# Altium PCB Infrared_Send_RE .PcbDoc
Units mil, origin at the board's own origin, x right, y up, seen from the top; angles counter-clockwise.
Board outline 2559.06 x 3937.01 mil, 2 copper layers (Top Layer, Bottom Layer); 84 components, 31 nets, 310 pads, 137 vias.
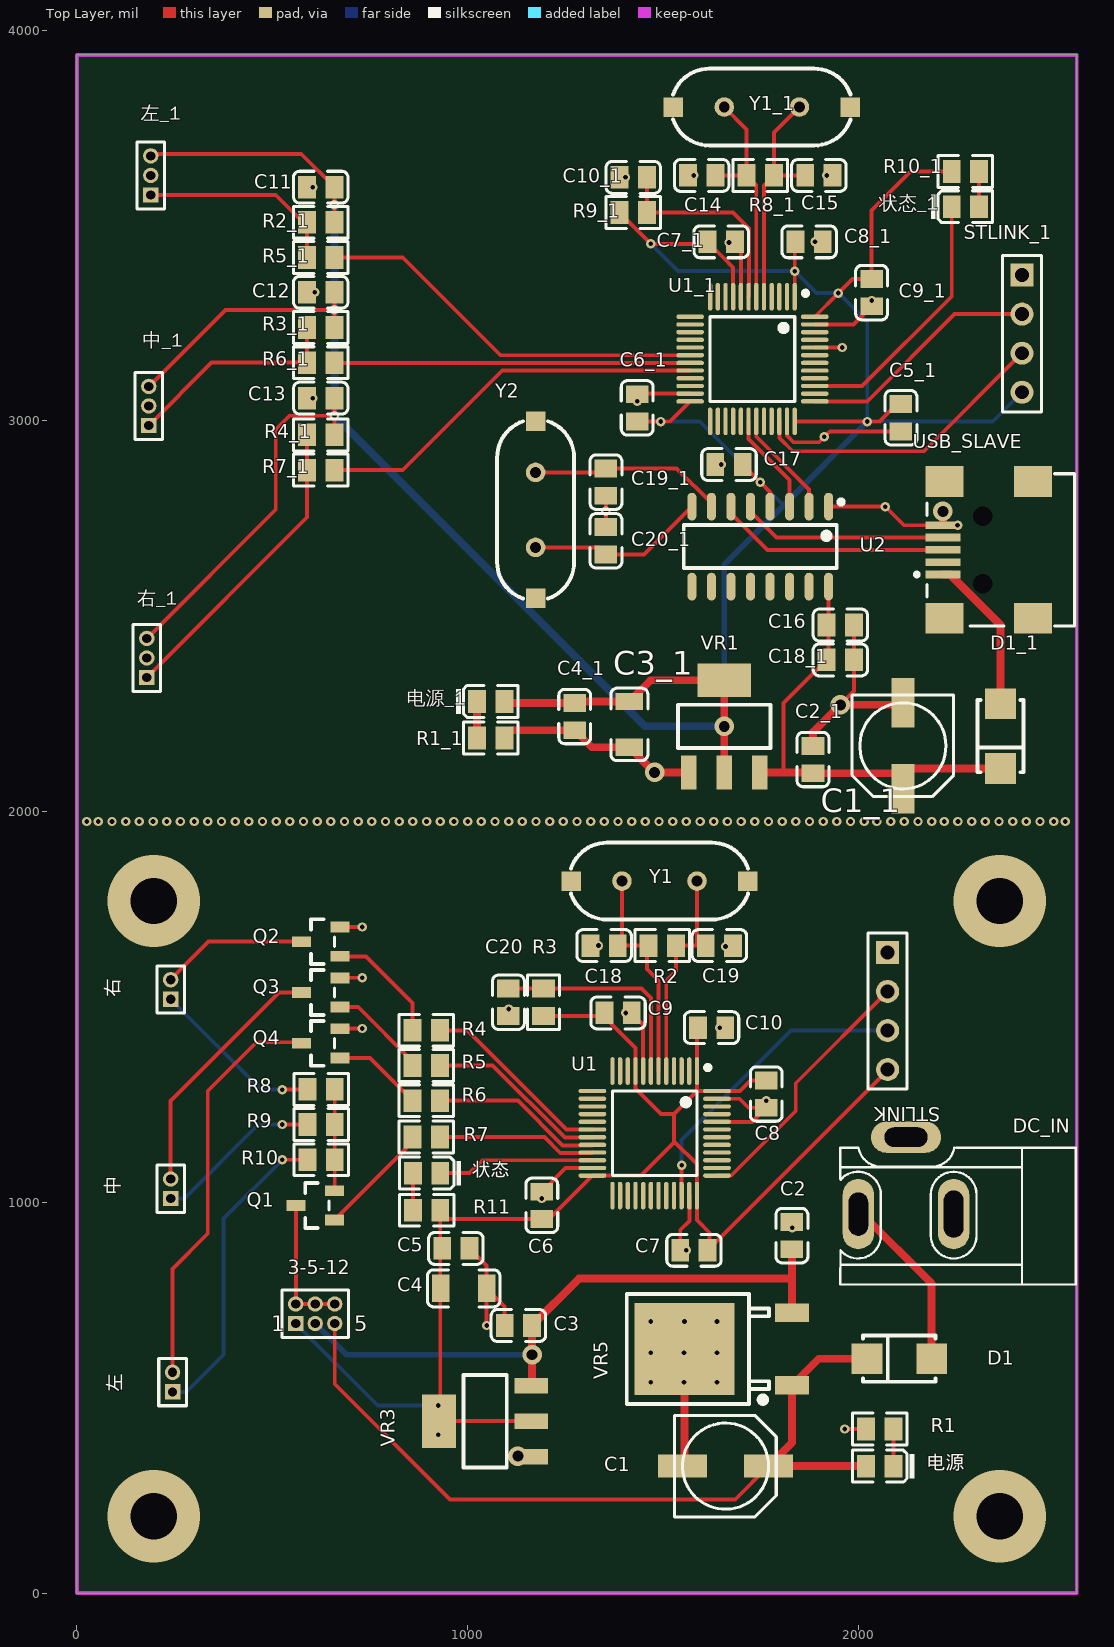
[diagram p0: Top Layer view]
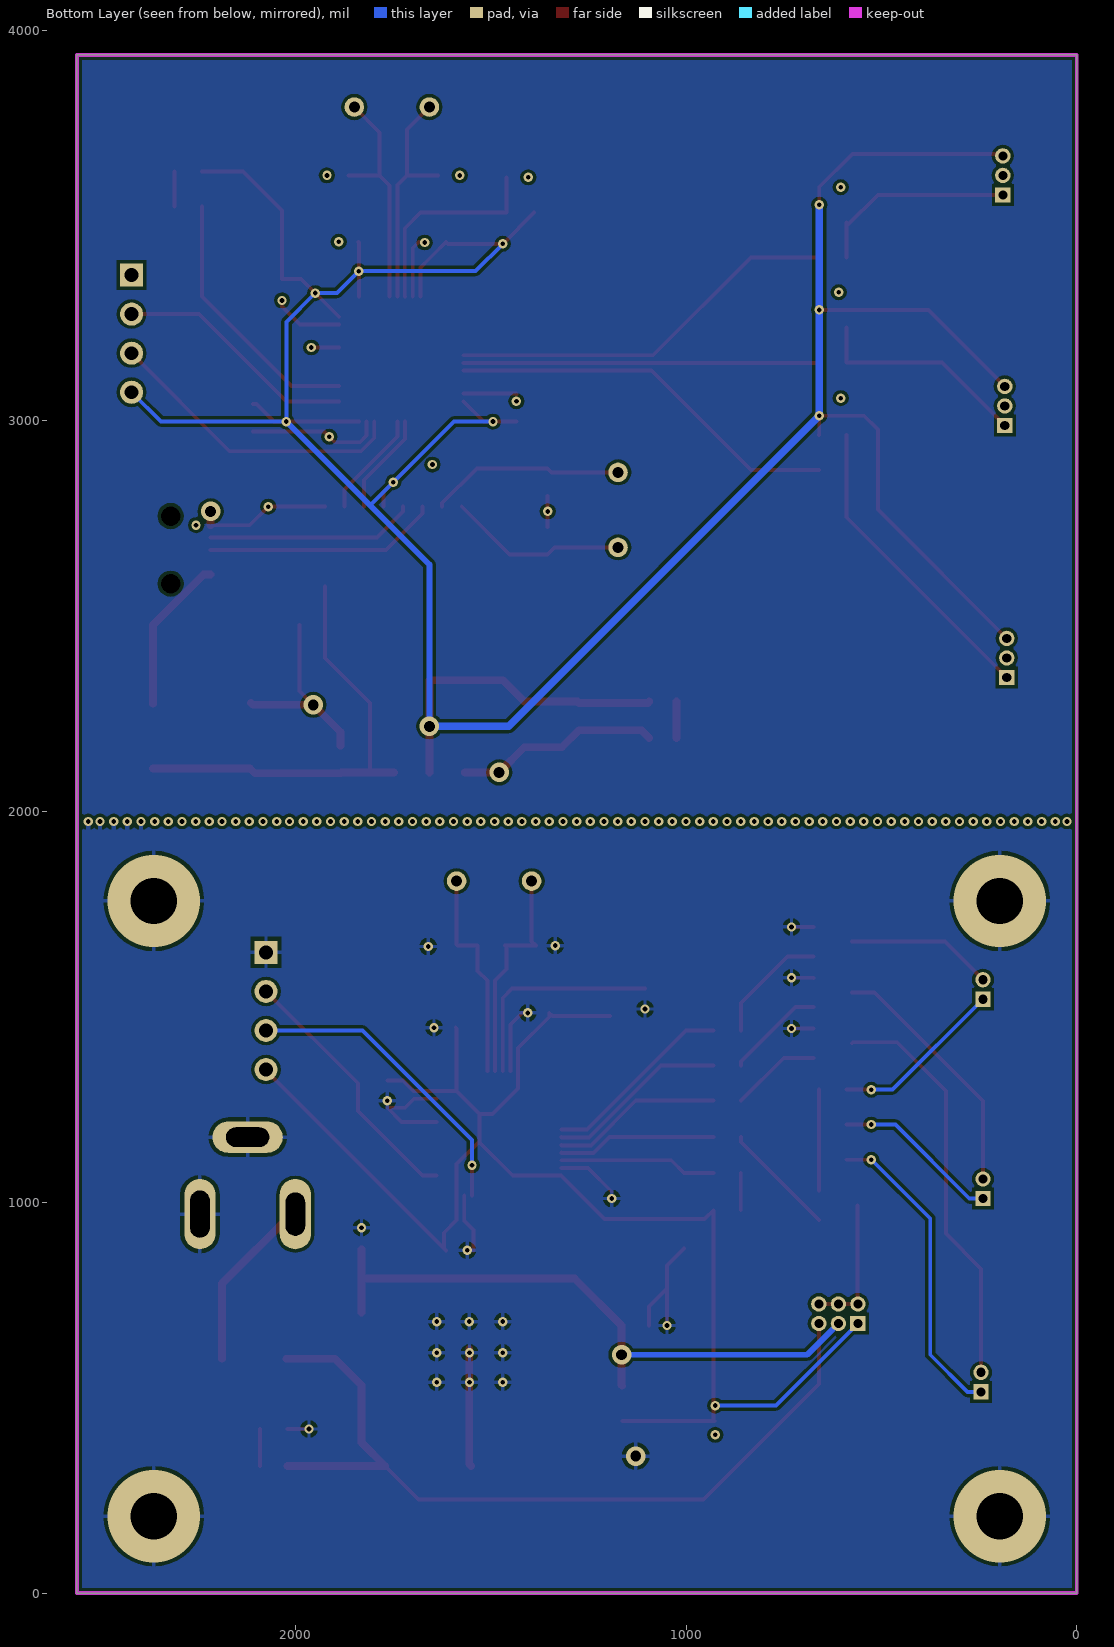
[diagram p1: Bottom Layer view, seen from below]
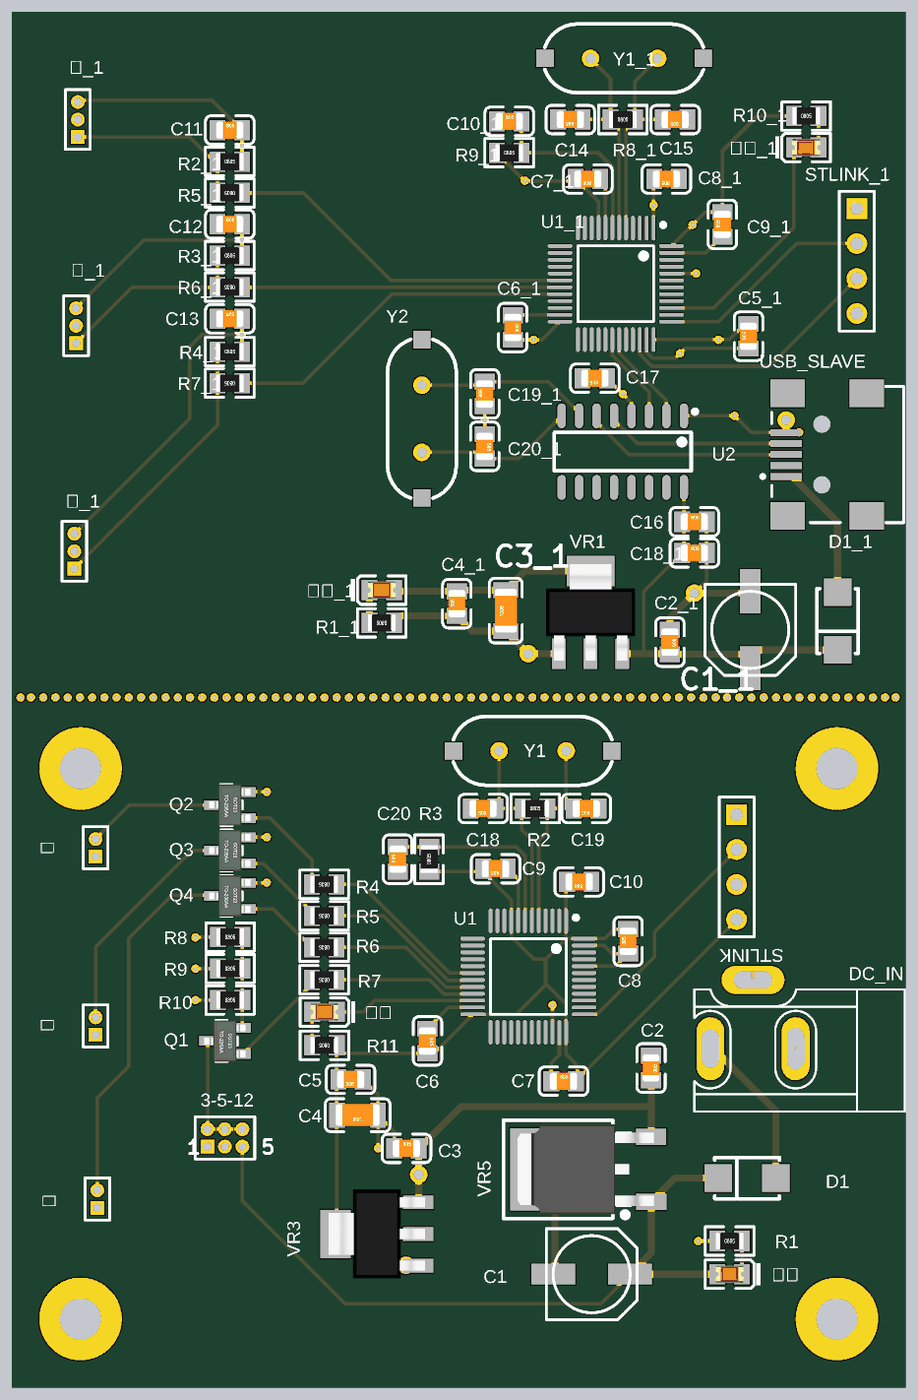
[diagram p2: 3D render of the assembled board from above, using the file's embedded part models]

## Layer stack, top to bottom
Top Solder: solder mask 0.4, Solder Resist, Dk 3.5
Top Layer: signal copper 1.4
Dielectric 1: dielectric 12.6, FR-4, Dk 4.8
Bottom Layer: signal copper 1.4
Bottom Solder: solder mask 0.4, Solder Resist, Dk 3.5

## Board outline
0,0 0,3937.01 2559.05,3937.01 2559.06,0

## Design rules (kind name [scope] priority, off if disabled: settings)
Clearance [All] p1: gap=8 ignorepadtopadclearanceinfootprint=FALSE
PolygonConnect [All] p1: connectstyle=Relief reliefconductorwidth=10 reliefentries=4 polygonreliefangle="90 Angle" airgapwidth=10
RoutingVias [All] p1: holewidth=28 width=50 viastyle="Through Hole" minholewidth=28 minwidth=50 maxholewidth=28 maxwidth=50
SolderMaskExpansion [All] p1: expansion=4
Width [All] p1: maxlimit=20 minlimit=8 preferedwidth=10
30 further rules are at their usual default settings.

## Classes and differential pairs
component class Infrared_Send: 3-5-12 C1 C2 C3 C4 C5 C6 C7 C8 C9 C10 C18 C19 C20 D1 DC_IN Q1 Q2 Q3 Q4 R1 R2 R3 R4 R5 R6 R7 R8 R9 R10 R11 STLINK U1 VR3 VR5 Y1 ״̬ 中 右 左 电源

## Components (designator, comment, footprint, x,y, rotation, side; value= is the part's Value field where it differs from the comment)
3-5-12 "MHDR2X3" MHDR2X3 560,690 r0 top
C1 "220uF" CC6.56.5 1660,325 r180 top
C1_1 "220uF" CC6.56.5 2114.05,2168.5 r90 top (schematic designator C1)
C2 "1uF (105) 10% 50V" LC-0805_C 1830,915 r270 top
C2_1 "100nF(104) 10% 50V" LC-0805_C 1884.05,2133.5 r270 top (schematic designator C2)
C3 "100nF(104) 10% 50V" LC-0805_C 1130,685 r0 top
C3_1 "4.7uF (475) 10% 50V" LC-1206_C 1414.05,2223.5 r90 top (schematic designator C3)
C4 "4.7uF (475) 10% 50V" LC-1206_C 990,780 r180 top
C4_1 "100nF(104) 10% 50V" LC-0805_C 1274.05,2243.5 r90 top (schematic designator C4)
C5 "100nF(104) 10% 50V" LC-0805_C 970,882.28 r180 top
C5_1 "100nF(104) 10% 50V" LC-0805_C 2109.05,3008.5 r90 top (schematic designator C5)
C6 "100nF(104) 10% 50V" LC-0805_C 1190,992.32 r270 top
C6_1 "100nF(104) 10% 50V" LC-0805_C 1434.05,3033.5 r270 top (schematic designator C6)
C7 "100nF(104) 10% 50V" LC-0805_C 1579.39,877.32 r0 top
C7_1 "100nF(104) 10% 50V" LC-0805_C 1649.05,3458.5 r180 top (schematic designator C7)
C8 "100nF(104) 10% 50V" LC-0805_C 1764.39,1277.32 r90 top
C8_1 "100nF(104) 10% 50V" LC-0805_C 1874.05,3458.5 r180 top (schematic designator C8)
C9 "100nF(104) 10% 50V" LC-0805_C 1385,1485 r180 top
C9_1 "100nF(104) 10% 50V" LC-0805_C 2034.05,3328.5 r90 top (schematic designator C9)
C10 "100nF(104) 10% 50V" LC-0805_C 1624.39,1447.32 r180 top
C10_1 "100nF(104) 10% 50V" LC-0805_C 1424.09,3623.5 r0 top (schematic designator C10)
C11 "4.7nF (472) 10% 50V" LC-0805_C 624.05,3598.5 r0 top
C12 "4.7nF (472) 10% 50V" LC-0805_C 624.05,3329.29 r0 top
C13 "4.7nF (472) 10% 50V" LC-0805_C 624.09,3058.5 r0 top
C14 "22pF (220) 5% 50V" LC-0805_C 1599.05,3628.5 r180 top
C15 "22pF (220) 5% 50V" LC-0805_C 1899.05,3628.5 r180 top
C16 "10uF (106) 10% 25V" LC-0805_C 1954.05,2477.69 r0 top
C17 "100nF(104) 10% 50V" LC-0805_C 1669.05,2888.5 r180 top
C18 "22pF (220) 5% 50V" LC-0805_C 1349.35,1657.32 r180 top
C18_1 "100nF(104) 10% 50V" LC-0805_C 1954.05,2388.5 r0 top (schematic designator C18)
C19 "22pF (220) 5% 50V" LC-0805_C 1644.43,1657.32 r180 top
C19_1 "22pF (220) 5% 50V" LC-0805_C 1354.05,2843.5 r90 top (schematic designator C19)
C20 "100nF(104) 10% 50V" LC-0805_C 1104.39,1512.32 r90 top
C20_1 "22pF (220) 5% 50V" LC-0805_C 1354.05,2693.5 r270 top (schematic designator C20)
D1 "SS210" LC-SMA(DO-214AC)_S1 2105,600 r0 top
D1_1 "SS210" LC-SMA(DO-214AC)_S1 2364.05,2193.5 r90 top (schematic designator D1)
DC_IN "POWER" DC10B 2419.09,1140.04 r180 top
Q1 "SS8050 Y1" LC-SOT-23(SOT-23-3) 610,992.32 r0 top locked
Q2 "SS8050 Y1" LC-SOT-23(SOT-23-3) 624.39,1667.28 r0 top locked
Q3 "SS8050 Y1" LC-SOT-23(SOT-23-3) 624.39,1537.28 r0 top locked
Q4 "SS8050 Y1" LC-SOT-23(SOT-23-3) 624.39,1407.28 r0 top locked
R1 "10KΩ (1002) ±1%" LC-0805_R 2055,420 r0 top
R1_1 "10KΩ (1002) ±1%" LC-0805_R 1059.09,2188.5 r180 top (schematic designator R1)
R2 "1MΩ (1004) ±1%" LC-0805_R 1498.29,1657.32 r0 top
R2_1 "4.7KΩ (4701) ±1%" LC-0805_R 624.05,3508.5 r0 top (schematic designator R2)
R3 "10KΩ (1002) ±1%" LC-0805_R 1194.39,1512.32 r90 top
R3_1 "4.7KΩ (4701) ±1%" LC-0805_R 624.05,3239.29 r0 top (schematic designator R3)
R4 "1KΩ (1001) ±1%" LC-0805_R 894.39,1440.35 r180 top
R4_1 "4.7KΩ (4701) ±1%" LC-0805_R 624.13,2964.39 r0 top (schematic designator R4)
R5 "1KΩ (1001) ±1%" LC-0805_R 894.39,1350.39 r180 top
R5_1 "1KΩ (1001) ±1%" LC-0805_R 624.09,3418.5 r180 top (schematic designator R5)
R6 "1KΩ (1001) ±1%" LC-0805_R 894.39,1260.35 r180 top
R6_1 "1KΩ (1001) ±1%" LC-0805_R 624.05,3149.29 r180 top (schematic designator R6)
R7 "1KΩ (1001) ±1%" LC-0805_R 894.39,1167.32 r180 top
R7_1 "1KΩ (1001) ±1%" LC-0805_R 624.13,2874.39 r180 top (schematic designator R7)
R8 "100Ω (1000) ±1%" LC-0805_R 625.04,1289.25 r0 top locked
R8_1 "1MΩ (1004) ±1%" LC-0805_R 1749.05,3628.5 r0 top (schematic designator R8)
R9 "100Ω (1000) ±1%" LC-0805_R 625.04,1199.25 r0 top locked
R9_1 "10KΩ (1002) ±1%" LC-0805_R 1424.05,3533.5 r0 top (schematic designator R9)
R10 "100Ω (1000) ±1%" LC-0805_R 625.04,1109.25 r0 top locked
R10_1 "10KΩ (1002) ±1%" LC-0805_R 2274.05,3638.5 r0 top (schematic designator R10)
R11 "10KΩ (1002) ±1%" LC-0805_R 895,980 r180 top
STLINK "Header 4" HDR1X4 2075,1640 r270 top
STLINK_1 "Header 4" HDR1X4 2419.05,3373.5 r270 top (schematic designator STLINK)
U1 "STM32F103C8T6" LC-LQFP-48_7x7x05P 1478.92,1176.77 r180 top
U1_1 "STM32F103C8T6" LC-LQFP-48_7x7x05P 1729.02,3158.5 r180 top (schematic designator U1)
U2 "CH340G" LC-SOIC-16_150mil 1749.05,2678.5 r180 top
USB_SLAVE "USB-B(Mini)" USB/SM0.8-6H5 2525.75,2670.12 r0 top
VR1 "AMS1117-3.3" LC-SOT-223 1656.93,2218.5 r270 top
VR3 "AMS1117-3.3" LC-SOT-223 1045,440 r0 top
VR5 "L78M05ABDT-TR" LC-TO-252-2-180 1830.59,625 r180 top
Y1 "8MHz" XTAL_US 1395.06,1822.32 r0 top
Y1_1 "8MHz" XTAL_US 1656.93,3803.5 r0 top (schematic designator Y1)
Y2 "12MHz" XTAL_US 1174.05,2868.5 r270 top
中 "MHDR1X2" MHDR1X2 240,1010 r90 top
中_1 "MHDR1X3" MHDR1X3 184.05,2988.5 r90 top (schematic designator 中)
右 "MHDR1X2" MHDR1X2 240,1520 r90 top
右_1 "MHDR1X3" MHDR1X3 179.05,2343.5 r90 top (schematic designator 右)
左 "MHDR1X2" MHDR1X2 245,515 r90 top
左_1 "MHDR1X3" MHDR1X3 189.05,3578.5 r90 top (schematic designator 左)
状态 "翠绿 0805" LC-0805_LED_S1 895,1075 r180 top (schematic designator ״̬)
状态_1 "翠绿 0805" LC-0805_LED_S1 2274.05,3548.5 r0 top (schematic designator ״̬)
电源 "红灯 0805" LC-0805_LED_S1 2055,325 r180 top locked
电源_1 "红灯 0805" LC-0805_LED_S1 1059.05,2282.17 r0 top (schematic designator 电源)

## Footprints (in the part's own frame and the unit in brackets; to place one, negate y for a bottom-side part, rotate by r counter-clockwise, add the part's x,y. Pads: shape width x height; smd on the part's side, far side on the other; paste and mask are expansions set on the pad)
CC6.56.5 [mm]
  rect 3.2x1.5 smd: 1(-2.794,0) 2(2.8,0)
  silkscreen extent -3.3,-3.3 3.3,3.3
DC10B [mil]
  oval 80x180 hole 50 slot 110 at 90 deg: 1(419.09,170)
  oval 80x180 hole 50 slot 120 at 90 deg: 2(175,170)
  oval 180x80 hole 50 slot 110 at 0 deg: 3(297.05,-26.85)
  silkscreen extent -138,0 465,350
HDR1X4 [mm] "Connector; Header; 4 Position"
  rect 1.5x1.5 hole 0.9: 1(0,0)
  round 1.5 hole 0.9: 2(2.54,0) 3(5.08,0) 4(7.62,0)
  silkscreen extent -1.27,-1.27 8.89,1.27
LC-0805_C [mm]
  rect 1.16x1.47 smd: 1(-0.89,0) 2(0.89,0)
  silkscreen extent -1.77,-1.04 1.77,1.04, body extent -1,-0.62 1,0.63, height 0.77
LC-0805_LED_S1 [mm]
  rect 1.16x1.47 smd: A(0.89,0) K(-0.89,0)
  silkscreen extent -2.25,-1.04 1.77,1.03, body extent -1.01,-0.62 1.01,0.62, height 1.1
LC-0805_R [mm]
  rect 1.16x1.47 smd: 1(-0.89,0) 2(0.89,0)
  silkscreen extent -1.77,-1.04 1.77,1.03, body extent -1,-0.62 1,0.63, height 0.49
LC-1206_C [mm]
  rect 1.13x1.8 smd: 1(-1.49,0) 2(1.49,0)
  silkscreen extent -2.36,-1.2 2.35,1.2, body extent -1.6,-0.81 1.6,0.79, height 1
LC-LQFP-48_7x7x05P [mm]
  oval 0.28x1.8 smd mask+0.051: 1(-2.75,-4.05) 2(-2.25,-4.05) 3(-1.75,-4.05) 4(-1.25,-4.05) 5(-0.75,-4.05) 6(-0.25,-4.05) 7(0.25,-4.05) 8(0.75,-4.05) 9(1.25,-4.05) 10(1.75,-4.05) 11(2.25,-4.05) 12(2.75,-4.05) 25(2.75,4.05) 26(2.25,4.05) 27(1.75,4.05) 28(1.25,4.05) 29(0.75,4.05) 30(0.25,4.05) 31(-0.25,4.05) 32(-0.75,4.05) 33(-1.25,4.05) 34(-1.75,4.05) 35(-2.25,4.05) 36(-2.75,4.05)
  oval 1.8x0.28 smd mask+0.051: 13(4.05,-2.75) 14(4.05,-2.25) 15(4.05,-1.75) 16(4.05,-1.25) 17(4.05,-0.75) 18(4.05,-0.25) 19(4.05,0.25) 20(4.05,0.75) 21(4.05,1.25) 22(4.05,1.75) 23(4.05,2.25) 24(4.05,2.75) 37(-4.05,2.75) 38(-4.05,2.25) 39(-4.05,1.75) 40(-4.05,1.25) 41(-4.05,0.75) 42(-4.05,0.25) 43(-4.05,-0.25) 44(-4.05,-0.75) 45(-4.05,-1.25) 46(-4.05,-1.75) 47(-4.05,-2.25) 48(-4.05,-2.75)
  silkscreen extent -3.6,-4.42 2.75,2.75
LC-SMA(DO-214AC)_S1 [mm]
  rect 2x2 smd: 1(2.1,0) 2(-2.1,0)
  silkscreen extent -2.35,-1.5 2.35,1.5
LC-SOIC-16_150mil [mm]
  oval 0.6x1.8 smd: 1(-4.445,-2.6) 2(-3.175,-2.6) 3(-1.905,-2.6) 4(-0.635,-2.6) 5(0.635,-2.6) 6(1.905,-2.6) 7(3.175,-2.6) 8(4.445,-2.6) 9(4.445,2.6) 10(3.175,2.6) 11(1.905,2.6) 12(0.635,2.6) 13(-0.635,2.6) 14(-1.905,2.6) 15(-3.175,2.6) 16(-4.445,2.6)
  silkscreen extent -5.4,-3.05 4.97,1.4
LC-SOT-23(SOT-23-3) [mm]
  rect 1.25x0.7 smd: 1(1.25,-0.95) 2(1.25,0.95) 3(-1.25,0)
  silkscreen extent -0.65,-1.46 0.9,1.46, body extent -1.5,-1.5 1.5,1.5, height 1.3
LC-SOT-223 [mm]
  rect 2.2x1 smd: 1(3,-2.3) 2(3,0) 3(3,2.3)
  rect 2.2x3.5 smd: 2(-3,0)
  silkscreen extent -1.4,-3 1.4,3, body extent -3.49,-3.24 3.49,3.24, height 1.64
LC-TO-252-2-180 [mm] "180度编带包装"
  rect 2.2x1.2 smd: 1(0,2.361) 3(0.004,-2.361)
  rect 6.5x6 smd: 2(7,0)
  silkscreen extent 1.5,-3.57 10.75,3.57, body extent -0.2,-3.27 9.74,3.27, height 2.44
MHDR1X2 [mm] "Connector; Header; 2 Position"
  rect 1x1 hole 0.6: 1(0,0)
  round 1 hole 0.6: 2(1.27,0)
  silkscreen extent -0.9,-0.9 2.17,0.9
MHDR1X3 [mm] "Connector; Header; 3 Position"
  rect 1x1 hole 0.6: 1(0,0)
  round 1 hole 0.6: 2(1.27,0) 3(2.54,0)
  silkscreen extent -0.9,-0.9 3.44,0.9
MHDR2X3 [mm] "Connector; Header; 3x2 Position"
  rect 1x1 hole 0.6: 1(0,0)
  round 1 hole 0.6: 2(0,1.27) 3(1.27,0) 4(1.27,1.27) 5(2.54,0) 6(2.54,1.27)
  silkscreen extent -0.9,-0.9 3.44,2.17
USB/SM0.8-6H5 [mm]
  rect 2.3x0.5 smd: 1(-7.85,-1.6) 2(-7.85,-0.8) 3(-7.85,0) 4(-7.85,0.8) 5(-7.85,1.6)
  rect 2.5x2 smd: 6(-7.75,4.45) 7(-1.996,4.45) 8(-7.75,-4.45) 9(-1.996,-4.45)
  round 0.6 hole 1.27 unplated: MH1(-5.25,2.2) MH2(-5.25,-2.2)
  silkscreen extent -9.67,-4.95 0.7,4.95
XTAL_US [mil]
  round 50 hole 28: 1(0,0) 2(192.13,0)
  rect 50x50 smd: ""(-130.32,0) ""(322.44,0)
  silkscreen extent -131,-98 323,98

## Part data
3-5-12: "Header, 3-Pin, Dual row", LatestRevisionDate=17-Jul-2002, LatestRevisionNote="Re-released for DXP Platform.", Publisher="Altium Limited"
C1 C1_1: library part CAP
C2: library part "0805 1uF (105) 10% 50V", "贴片电容", Package=0805, SuppliersPartNumber=C28323, ComponentLink1Description=供应商, ComponentLink1URL=http://www.szlcsc.com/product/details_29074.html, Supplier=LC
C2_1 C3 C4_1 C5 C5_1 C6 C6_1 C7 C7_1 C8 C8_1 C9 C9_1 C10 C10_1 C17 C18_1 C20: library part "0805 100nF(104) 10% 50V", "贴片电容", Package=0805, SuppliersPartNumber=C49678, ComponentLink1Description=供应, ComponentLink1URL=http://www.szlcsc.com/product/details_50686.html, Supplier=LC
C3_1 C4: library part "1206 4.7uF (475) 10% 50V", "贴片电容", Package=1206, SuppliersPartNumber=C29823, ComponentLink1Description=供应商, ComponentLink1URL=http://www.szlcsc.com/product/details_30577.html, Supplier=LC
C11 C12 C13: library part "0805 4.7nF (472) 10% 50V", "贴片电容", Package=0805, SuppliersPartNumber=C1744, ComponentLink1Description=供应, ComponentLink1URL=http://www.szlcsc.com/product/details_2096.html, Supplier=LC
C14 C15 C18 C19 C19_1 C20_1: library part "0805 22pF (220) 5% 50V", "贴片电容", Package=0805, SuppliersPartNumber=C1804, ComponentLink1Description=供应, ComponentLink1URL=http://www.szlcsc.com/product/details_2156.html, Supplier=LC
C16: library part "0805 10uF (106) 10% 25V", "贴片电容", Package=0805, SuppliersPartNumber=C15850, ComponentLink1Description=供应, ComponentLink1URL=http://www.szlcsc.com/product/details_16532.html, Supplier=LC
D1 D1_1: library part "SMA(DO-214AC) SS210", "二极管", Package=SMA(DO-214AC), SuppliersPartNumber=C14996, ComponentLink1Description=供应, ComponentLink1URL=http://www.szlcsc.com/product/details_15669.html, Supplier=LC
DC_IN: library part POW
Q1 Q2 Q3 Q4: library part "SOT-23 SS8050 Y1", "三极管", Package=SOT-23, SuppliersPartNumber=C2150, ComponentLink1Description=供应, ComponentLink1URL=http://www.szlcsc.com/product/details_2507.html, Supplier=LC
R1 R1_1 R3 R9_1 R10_1 R11: library part "0805 10KΩ (1002) 1%", "贴片电阻", Package=0805, SuppliersPartNumber=C17414, ComponentLink1URL=http://www.szlcsc.com/product/details_18102.html, Supplier=LC
  R1 R1_1 R3 R9_1: ComponentLink1Description=供应
  R10_1 R11: ComponentLink1Description=供应商
R2 R8_1: library part "0805 1MΩ (1004) 1%", "贴片电阻", Package=0805, SuppliersPartNumber=C17514, ComponentLink1Description=供应, ComponentLink1URL=http://www.szlcsc.com/product/details_18202.html, Supplier=LC
R2_1 R3_1 R4_1: library part "0805 4.7KΩ (4701) 1%", "贴片电阻", Package=0805, SuppliersPartNumber=C17673, ComponentLink1Description=供应商, ComponentLink1URL=http://www.szlcsc.com/product/details_18361.html, Supplier=LC
R4 R5 R5_1 R6 R6_1 R7 R7_1: library part "0805 1KΩ (1001) 1%", "贴片电阻", Package=0805, SuppliersPartNumber=C17513, ComponentLink1URL=http://www.szlcsc.com/product/details_18201.html, Supplier=LC
  R4 R5 R6 R7: ComponentLink1Description=供应
  R5_1 R6_1 R7_1: ComponentLink1Description=供应商
R8 R9 R10: library part "0805 100Ω (1000) 1%", "贴片电阻", Package=0805, SuppliersPartNumber=C17408, ComponentLink1URL=http://www.szlcsc.com/product/details_18096.html, Supplier=LC
  R8: ComponentLink1Description=供应
  R9 R10: ComponentLink1Description=供应商
STLINK STLINK_1: "Header, 4-Pin", LatestRevisionDate=17-Jul-2002, LatestRevisionNote="Re-released for DXP Platform.", Publisher="Altium Limited"
U1 U1_1: "ARM", Package=LQFP-48_7x7x05P, SuppliersPartNumber=C8734, ComponentLink1Description=供应, ComponentLink1URL=http://www.szlcsc.com/product/details_9243.html, Supplier=LC
U2: "USB", Package=SOIC-16_150mil, SuppliersPartNumber=C14267, ComponentLink1Description=供应, ComponentLink1URL=http://www.szlcsc.com/product/details_14927.html, Supplier=LC
USB_SLAVE: library part USB5
VR1 VR3: library part "SOT-223 AMS1117-3.3", "低压差线性稳压(LDO)", Package=SOT-223, SuppliersPartNumber=C6186, ComponentLink1Description=供应, ComponentLink1URL=http://www.szlcsc.com/product/details_6652.html, Supplier=LC
VR5: library part "TO-252-2 L78M05ABDT-TR", "低压差线性稳压(LDO)", Package=TO-252-2, SuppliersPartNumber=C58069, ComponentLink1Description=供应商, ComponentLink1URL=http://www.szlcsc.com/product/details_59107.html, Supplier=LC
Y1 Y1_1 Y2: library part XTAL, "Crystal Oscillator", LatestRevisionDate=17-Jul-2002, LatestRevisionNote="Re-released for DXP Platform.", Published=8-Jun-2000, Publisher="Altium Limited"
中 右 左: "Header, 2-Pin", LatestRevisionDate=17-Jul-2002, LatestRevisionNote="Re-released for DXP Platform.", Publisher="Altium Limited"
中_1 右_1 左_1: "Header, 3-Pin", LatestRevisionDate=17-Jul-2002, LatestRevisionNote="Re-released for DXP Platform.", Publisher="Altium Limited"
状态 状态_1: library part "0805 翠绿", "发光二极管", Package=0805, SuppliersPartNumber=C2297, ComponentLink1Description=供应商, ComponentLink1URL=http://www.szlcsc.com/product/details_2670.html, Supplier=LC
电源 电源_1: library part "0805 红灯", "发光二极管", Package=0805, SuppliersPartNumber=C2295, ComponentLink1Description=供应, ComponentLink1URL=http://www.szlcsc.com/product/details_2668.html, Supplier=LC

## Via types
v1: diameter 24, hole 12, Top Layer to Bottom Layer, 127 vias
v2: diameter 50, hole 28, Top Layer to Bottom Layer, 6 vias
v3: diameter 236.22, hole 118.11, Top Layer to Bottom Layer, 4 vias

## Nets (pads, with @x,y where several pads share a name; then routed paths per layer and width w, separated by ;. In a path a pad name is that pad's centre, name@x,y a point inside that pad or via, vN(x,y) a via of type N, cw(c..) or ccw(c..) an arc to the next point about the centre after c; other vN are vias at no path point)
38K: Q1.1 R7.2 | length 295.3
  Top Layer w10: Q1.1 859.35,1155.06 R7.2
+3.3: 3-5-12.1 C4.2 C5.2 C6.2 C7.2 C8.2 C9.2 C10.2 R3.1 R11.1 STLINK.4 U1.1 U1.9 U1.24 U1.36 U1.48 VR3.2 | length 3901.9
  Top Layer w10: VR3.2@1163.11,440 926.89,440 929.96,443.07 929.96,685 929.96,775 930.04,775.08 R11.1 952.76,957.28 C6.2 1208.25,957.28 U1.24 1443.44,1068.5 1530,1155.06 ; R3.1 1342.24,1477.28 C9.2 1349.96,1475.04 1429.71,1395.29 U1.9 1429.71,1291.43 1495.16,1225.98 1528.13,1225.98 ; C10.2 1587.19,1445.16 U1.1 1587.19,1285.04 ; C7.2 C7.2@1619.39,882.28 ; C8.2 1724.43,1312.36 1697.11,1285.04 U1.48 1587.19,1285.04 ; STLINK.4 2075,1337.89 C7.2@1619.39,882.28 ; 1528.13,1225.98 1528.13,1156.93 1530,1155.06 ; 1528.13,1225.98 1587.19,1285.04 ; 1530,1155.06 1587.19,1097.87 U1.36 1587.19,954.53 1619.39,922.32 C7.2@1619.39,882.28
  Bottom Layer w10: 3-5-12.1 770,480 v1(925,480)
  other v1: 925,405
+5: 3-5-12.3 C2.2 C3.2 VR3.3 VR5.3 | length 1718
  Top Layer w20: VR3.3 1165.04,532.48 C3.2 1285.04,805 1830.43,805 ; C2.2 1830.43,879.53 1830.43,805 ; VR5.3 1830.43,805
  Bottom Layer w15: 3-5-12.3@614.81,690 3-5-12.3 690,610 690.24,610 ; 624.81,675.43 690.24,610 ; v2(1165,610) 690.24,610
+12: 3-5-12.5 C1.1 D1.2 VR5.1 电源.A | length 2124.4
  Top Layer w10: 3-5-12.5 660,535 955,240 1685,240 C1.1
  Top Layer w20: 电源.A C1.1 1830.59,385.59 VR5.1 1898.55,600 D1.2
GND: C1.2 C2.1 C3.1 C4.1 C5.1 C6.1 C7.1 C8.1 C9.1 C10.1 C18.2 C19.1 C20.1 DC_IN.2 DC_IN.3 Q2.2 Q3.2 Q4.2 R1.1 STLINK.1 U1.8 U1.23 U1.35 U1.44 U1.47 VR3.1 VR5.2 | length 1598
  Top Layer w10: Q4.2 674.08,1445.16 v1(730,1445.16) ; Q3.2 673.92,1575 v1(730,1575) ; Q2.2 673.92,1705 v1(730,1705) ; C5.1 1048.66,838.66 C4.1 ; v1(1048.66,685) C4.1 ; C3.1 1094.96,733.7 C4.1 ; C6.1 1250.83,1088.19 U1.23 ; C9.1 1449.39,1455.65 U1.8 ; C7.1 1544.35,928.86 1567.5,952.01 U1.35 ; U1.44 1728.41,1206.3 C8.1 1719.43,1242.28 1696.36,1265.35 U1.47 ; v1(1965,420) R1.1
  Top Layer w20: C1.2 1555,330.24 VR5.2
  other v1: 1469.08,540 1554.08,540 1638.37,540 1469.08,615 1554.08,615 1638.37,615 1469.08,695 1555,695 1638.37,695 1560,877.32 1830.59,935 1190,1010 1764.39,1260 1645,1447.32 1405,1485 1105,1495 1660,1655 1335,1657.32 2395,1975 2430,1975 2465,1975 2500,1975 2530,1975
  other v2: 1128.7,350.71
  other v3: 196.85,196.85 2362.2,196.85 196.85,1771.65 2362.2,1771.65
Left: Q2.1 R4.2 | length 305.4
  Top Layer w10: Q2.1 740.12,1629.88 859.35,1510.65 R4.2
Middle: Q3.1 R5.2 | length 253.7
  Top Layer w10: Q3.1 720.12,1499.88 859.35,1360.65 R5.2
Net3-5-12_2: 3-5-12.2 3-5-12.4 3-5-12.6 Q1.3 | length 352.6
  Top Layer w10: Q1.3 560.79,740.79 3-5-12.2 3-5-12.6
NetC18_1: C18.1 R2.1 U1.6 Y1.1 | length 583.1
  Top Layer w10: Y1.1 1395.06,1667.99 C18.1 R2.1 1459.39,1653.46 1459.39,1597.28 1488.76,1567.91 U1.6
NetC19_2: C19.2 R2.2 U1.5 Y1.2 | length 543.6
  Top Layer w10: U1.5 1508.45,1567.44 1533.33,1592.32 R2.2 ; R2.2@1538.33,1657.32 1584.39,1657.32 1587.19,1660.12 Y1.2
NetC20_2: C20.2 R3.2 U1.7 | length 561.8
  Top Layer w10: C20.2 R3.2 1445.15,1547.36 1469.08,1523.44 U1.7
NetD1_1: D1.1 DC_IN.1 | length 453.6
  Top Layer w20: DC_IN.1 2009.96,970.04 2187.68,792.32 D1.1
NetQ1_2: Q1.2 R8.2 R9.2 R10.2 | length 259.9
  Top Layer w10: Q1.2 660.08,1030.59 R10.2 R9.2 R8.2
NetQ2_3: Q2.3 右.2 | length 375.5
  Top Layer w10: 右.2 337.28,1667.28 Q2.3
NetQ3_3: Q3.3 中.2 | length 650
  Top Layer w10: 中.2 240,1260 517.28,1537.28 Q3.3
NetQ4_3: Q4.3 左.2 | length 1050.4
  Top Layer w10: 左.2 245,830 335,920 335,1285 460,1410 572.46,1410 Q4.3
NetR1_2: R1.2 电源.K | length 95
  Top Layer w10: 电源.K R1.2
NetR4_1: R4.1 U1.18 | length 495.1
  Top Layer w10: R4.1 999.65,1440.35 1253.39,1186.61 U1.18
NetR5_1: R5.1 U1.19 | length 467
  Top Layer w10: R5.1 1064.15,1350.39 1248.79,1165.76 1318.3,1165.76 U1.19
NetR6_1: R6.1 U1.20 | length 437.9
  Top Layer w10: R6.1 1128.73,1260.35 1243.02,1146.07 1318.3,1146.07 U1.20
NetR7_1: R7.1 U1.21 | length 407.5
  Top Layer w10: R7.1 1196.31,1167.32 1237.25,1126.39 1318.3,1126.39 U1.21
NetR8_1: R8.1 右.1 | length 445.9
  Top Layer w10: v1@525.75,1289.25 R8.1
  Bottom Layer w10: 右.1 471.5,1288.5 v1(525.75,1288.5)
NetR9_1: R9.1 中.1 | length 428.4
  Top Layer w10: v1(525.75,1199.25) R9.1
  Bottom Layer w10: 中.1 275,1010 464.25,1199.25 v1(525.75,1199.25)
NetR10_1: R10.1 左.1 | length 795.3
  Top Layer w10: v1(525.75,1109.25) R10.1
  Bottom Layer w10: 左.1 280,515 375,610 375,958.5 v1(525.75,1109.25)
NetR11_2: R11.2 状态.A | length 95
  Top Layer w10: R11.2 状态.A
NetU1_22: U1.22 状态.K | length 403
  Top Layer w10: 状态.K 1005,1075 1037.87,1107.87 U1.22
Right: Q4.1 R6.2 | length 231.1
  Top Layer w10: Q4.1 749.83,1369.88 R6.2
SWCLK: STLINK.2 U1.37 | length 673.7
  Top Layer w10: U1.37 1674.79,1068.5 1840,1233.72 1840,1305 STLINK.2
SWDIO: STLINK.3 U1.34 | length 785.9
  Top Layer w10: U1.34 v1(1547.82,1095)
  Bottom Layer w10: v1(1547.82,1095) 1547.82,1160.14 1827.68,1440 STLINK.3
U_RX: U1.31
U_TX: U1.30
pads on no net: C1_1.1 C1_1.2 C2_1.1 C2_1.2 C3_1.1 C3_1.2 C4_1.1 C4_1.2 C5_1.1 C5_1.2 C6_1.1 C6_1.2 C7_1.1 C7_1.2 C8_1.1 C8_1.2 C9_1.1 C9_1.2 C10_1.1 C10_1.2 C11.1 C11.2 C12.1 C12.2 C13.1 C13.2 C14.1 C14.2 C15.1 C15.2 C16.1 C16.2 C17.1 C17.2 C18_1.1 C18_1.2 C19_1.1 C19_1.2 C20_1.1 C20_1.2 D1_1.1 D1_1.2 R1_1.1 R1_1.2 R2_1.1 R2_1.2 R3_1.1 R3_1.2 R4_1.1 R4_1.2 R5_1.1 R5_1.2 R6_1.1 R6_1.2 R7_1.1 R7_1.2 R8_1.1 R8_1.2 R9_1.1 R9_1.2 R10_1.1 R10_1.2 STLINK_1.1 STLINK_1.2 STLINK_1.3 STLINK_1.4 U1.2 U1.3 U1.4 U1.10 U1.11 U1.12 U1.13 U1.14 U1.15 U1.16 U1.17 U1.25 U1.26 U1.27 U1.28 U1.29 U1.32 U1.33 U1.38 U1.39 U1.40 U1.41 U1.42 U1.43 U1.45 U1.46 U1_1.1 U1_1.2 U1_1.3 U1_1.4 U1_1.5 U1_1.6 U1_1.7 U1_1.8 U1_1.9 U1_1.10 U1_1.11 U1_1.12 U1_1.13 U1_1.14 U1_1.15 U1_1.16 U1_1.17 U1_1.18 U1_1.19 U1_1.20 U1_1.21 U1_1.22 U1_1.23 U1_1.24 U1_1.25 U1_1.26 U1_1.27 U1_1.28 U1_1.29 U1_1.30 U1_1.31 U1_1.32 U1_1.33 U1_1.34 U1_1.35 U1_1.36 U1_1.37 U1_1.38 U1_1.39 U1_1.40 U1_1.41 U1_1.42 U1_1.43 U1_1.44 U1_1.45 U1_1.46 U1_1.47 U1_1.48 U2.1 U2.2 U2.3 U2.4 U2.5 U2.6 U2.7 U2.8 U2.9 U2.10 U2.11 U2.12 U2.13 U2.14 U2.15 U2.16 USB_SLAVE.1 USB_SLAVE.2 USB_SLAVE.3 USB_SLAVE.4 USB_SLAVE.5 USB_SLAVE.6 USB_SLAVE.7 USB_SLAVE.8 USB_SLAVE.9 USB_SLAVE.MH1 USB_SLAVE.MH2 VR1.1 VR1.2 VR1.3 Y1. Y1_1. Y1_1.1 Y1_1.2 Y2. Y2.1 Y2.2 中_1.1 中_1.2 中_1.3 右_1.1 右_1.2 右_1.3 左_1.1 左_1.2 左_1.3 状态_1.A 状态_1.K 电源_1.A 电源_1.K
copper on no net: | length 24610.7
  Top Layer w10: 179.05,2343.5 589.09,2753.54 589.09,2874.39 589.09,2964.39 ; 179.05,2443.5 509.05,2773.5 509.05,2978.5 544.05,3013.5 v1(659.13,3013.5) ; 184.05,2988.5 344.84,3149.29 589.02,3149.29 589.02,3239.29 ; 184.05,3088.5 379.84,3284.29 v1(659.09,3284.29) ; 189.05,3578.5 509.05,3578.5 589.02,3498.54 ; 189.05,3678.5 194.06,3683.5 574.17,3683.5 659.09,3598.58 659.09,3598.5 v1(659.09,3553.5) 659.09,3508.5 ; 589.02,3418.54 589.02,3498.54 ; 589.02,3508.5 589.02,3498.54 ; 659.09,3149.29 659.72,3148.66 1569.57,3148.66 ; 659.09,3239.29 v1(659.09,3284.29) ; 659.09,3329.29 v1(659.09,3284.29) ; 659.17,2874.39 834.05,2874.39 1088.65,3128.98 1569.57,3128.98 ; 659.17,2964.39 659.13,2964.43 v1(659.13,3013.5) ; 659.13,3058.5 v1(659.13,3013.5) ; 659.13,3418.5 834.05,3418.5 1084.21,3168.35 1569.57,3168.35 ; 1174.05,2676.38 1336.14,2676.38 1354.05,2658.46 1451.65,2658.46 1574.05,2780.87 ; 1174.05,2868.5 1344.02,2868.5 1354.05,2878.54 1535.09,2878.54 1624.05,2789.58 1624.05,2780.87 ; 1274.05,2278.54 1277.68,2282.17 ; 1354.05,2728.54 1354.05,2808.46 ; 1389.02,3533.5 1389.02,3533.43 v1(1468.94,3453.5) 1609.02,3453.5 1614.02,3458.5 1648.26,3424.26 1648.26,3424.18 1655.88,3416.57 1655.95,3416.57 1679.8,3392.72 1679.8,3317.95 ; 1434.05,2998.46 v1(1494.05,2998.46) 1517.79,2998.46 1569.57,3050.24 ; 1434.05,3068.54 1435.43,3069.92 1569.57,3069.92 ; 1459.13,3623.5 1459.13,3533.54 1459.09,3533.5 1679.25,3533.5 1719.93,3492.83 1719.93,3318.71 1719.17,3317.95 ; 1634.09,3628.5 1714.02,3628.5 ; 1656.93,3803.5 1714.02,3746.42 1714.02,3628.5 ; 1674.05,2780.87 1674.05,2763.5 1767.44,2670.12 2216.69,2670.12 ; 1684.09,3458.5 1699.49,3443.11 1699.49,3317.95 ; 1704.09,2888.5 v1(1749.05,2843.54) 1774.05,2818.54 1774.05,2780.87 ; 1719.17,2999.06 1719.17,2954.27 1824.05,2849.39 1824.05,2780.87 ; 1724.05,2780.87 1724.05,2768.5 1790.95,2701.61 2216.69,2701.61 ; 1738.86,2999.06 1738.86,2960.04 1874.05,2824.84 1874.05,2780.87 ; 1738.86,3317.95 1738.86,3558.66 1738.86,3603.66 1714.02,3628.5 ; 1758.54,3317.95 1758.54,3560.47 1758.54,3602.95 1784.09,3628.5 ; 1797.91,2999.06 1797.91,2956.87 1832.15,2922.63 2168.18,2922.63 2419.05,3173.5 ; 1809.05,2100.39 1809.05,2278.54 1919.02,2388.5 1924.05,2393.54 1924.05,2576.14 ; 1817.6,2999.06 1817.6,2962.64 1834.61,2945.63 1899.05,2945.63 1926.89,2973.46 2109.05,2973.46 ; 1837.28,2999.06 2054.61,2999.06 2099.09,3043.54 2109.05,3043.54 ; 1837.28,3317.95 v1(1837.28,3383.5) 1837.28,3456.77 1839.02,3458.5 ; 1849.05,3803.5 1784.09,3738.54 1784.09,3628.5 ; 1864.02,3628.5 1784.09,3628.5 ; 1888.46,3050.24 2022.95,3050.24 2246.22,3273.5 2419.05,3273.5 ; 1888.46,3089.61 2009.95,3089.61 2239.05,3318.71 2239.05,3548.46 2239.02,3548.5 ; 1888.46,3188.03 v1(1959.05,3188.03) ; 1888.46,3247.09 1987.68,3247.09 2034.05,3293.46 ; 1888.46,3266.77 v1(1949.05,3327.36) 1985.24,3363.54 2034.05,3363.54 2034.05,3538.5 2134.05,3638.5 2239.02,3638.5 ; 1924.05,2780.87 v1(2069.05,2780.87) 2116.81,2733.11 2216.69,2733.11 ; v2(1954.05,2273.62) 1989.09,2308.66 1989.09,2388.5 1989.09,2477.69 ; 2309.09,3548.5 2309.09,3638.5
  Top Layer w20: 1024.02,2282.17 1024.02,2188.54 1024.05,2188.5 ; 1094.09,2282.17 1097.72,2278.54 1274.05,2278.54 ; 1094.13,2188.5 1114.09,2208.46 1274.05,2208.46 1317.68,2164.84 1414.05,2164.84 v2(1478.5,2100.39) 1566.38,2100.39 ; 1277.68,2282.17 1414.05,2282.17 1468.5,2336.61 1656.93,2336.61 v2(1656.93,2218.5) 1656.93,2100.39 ; 1747.48,2100.39 1809.05,2100.39 1882.13,2100.39 1884.05,2098.46 2104.02,2098.46 2116.38,2110.83 2364.05,2110.83 ; 1884.05,2168.54 1884.05,2203.62 v2(1954.05,2273.62) 2108.94,2273.62 2114.05,2278.74 ; 2216.69,2607.13 2234.62,2607.13 2364.05,2477.69 2364.05,2276.18 ; 2216.69,2733.11 v2(2216.69,2768.5)
  Bottom Layer w10: v1(659.13,3013.5) v1(659.13,3013.5) ; v1(1468.94,3453.5) 1538.94,3383.5 v1(1837.28,3383.5) 1893.42,3327.36 v1(1949.05,3327.36) 2022.95,3253.46 v1(2022.95,2998.5) 2344.06,2998.5 2419.05,3073.5 ; v1(1494.05,2998.46) 1594.13,2998.46 v1(1749.05,2843.54) 1807.99,2784.61 1809.05,2784.61
  Bottom Layer w15: v2(1656.93,2218.5) 1656.93,2632.48 1809.05,2784.61 v1(2022.95,2998.5)
  Bottom Layer w20: v1(659.13,3013.5) v1(659.09,3284.29) v1(659.09,3553.5) ; v1(659.13,3013.5) 1454.13,2218.5 v2(1656.93,2218.5)
  other v1: 25,1975 55,1975 90,1975 125,1975 160,1975 195,1975 230,1975 265,1975 300,1975 335,1975 370,1975 405,1975 440,1975 475,1975 510,1975 545,1975 580,1975 615,1975 650,1975 685,1975 720,1975 755,1975 790,1975 825,1975 860,1975 895,1975 930,1975 965,1975 1000,1975 1035,1975 1070,1975 1105,1975 1140,1975 1175,1975 1210,1975 1245,1975 1280,1975 1315,1975 1350,1975 1385,1975 1420,1975 1455,1975 1490,1975 1525,1975 1560,1975 1595,1975 1630,1975 1665,1975 1700,1975 1735,1975 1770,1975 1805,1975 1840,1975 1875,1975 1910,1975 1945,1975 1980,1975 2015,1975 2047.68,1975 2082.68,1975 2117.68,1975 2152.68,1975 2187.68,1975 2220,1975 2255,1975 2290,1975 2325,1975 2360,1975 2254.05,2733.5 1354.05,2768.5 1649.05,2888.5 1912.97,2959.55 1434.05,3050.24 604.05,3058.5 2034.05,3308.5 609.05,3329.29 1669.05,3456.77 1889.05,3458.5 604.05,3598.5 1404.05,3623.5 1579.05,3628.5 1919.05,3628.5

## Polygon pours and split planes (outlines as drawn)
no net on Bottom Layer "Bottom Layer-No Net" (solid, pour order 8): 0,3937.01 2559.05,3937.01 2559.05,1973.5 2554.05,1968.5 0,1968.5
GND on Bottom Layer "Bottom Layer-GND" (solid, pour order 2): 5,1968.5 2564.05,1968.5 2564.06,0 5,0

## Keep-outs
Keep-Out Layer:
  the board outline again, w10

## Text inside footprints (layer, text, board x,y; h text height)
3-5-12: Top Overlay "5" at 709.61,670 h39.37; Top Overlay "1" at 497.01,670 h39.37